# Altium PCB ACS712 Module PCB.PcbDoc
Units mm, origin at the board's own origin, x right, y up, seen from the top; angles counter-clockwise.
Board outline 26.8 x 11.3 mm, 2 copper layers (Top Layer, Bottom Layer); 9 components, 4 nets, 20 pads, 0 vias.
Unrouted connection lines stored in the file: 8.
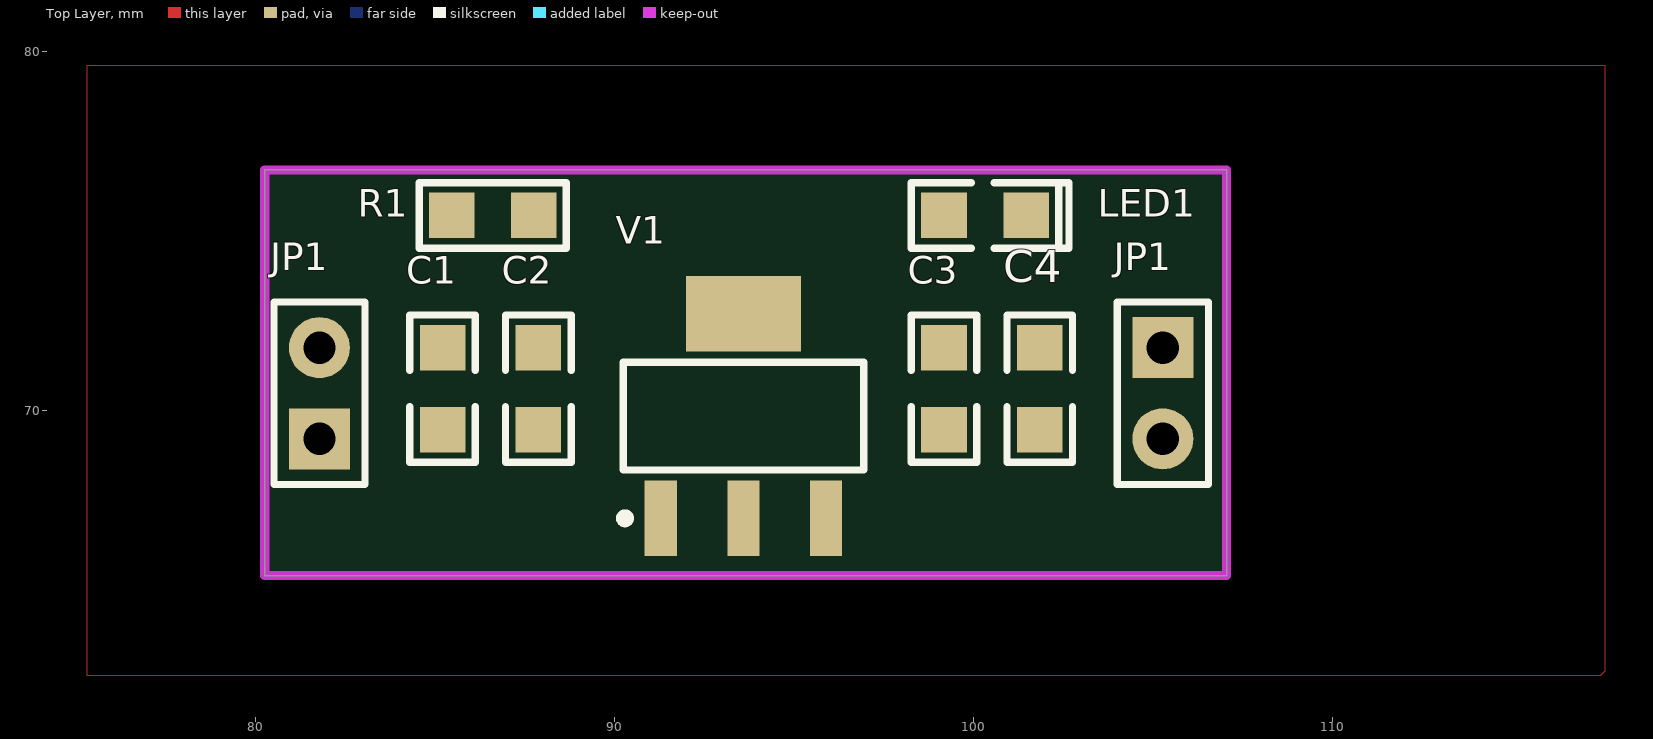
[diagram p0: Top Layer view]
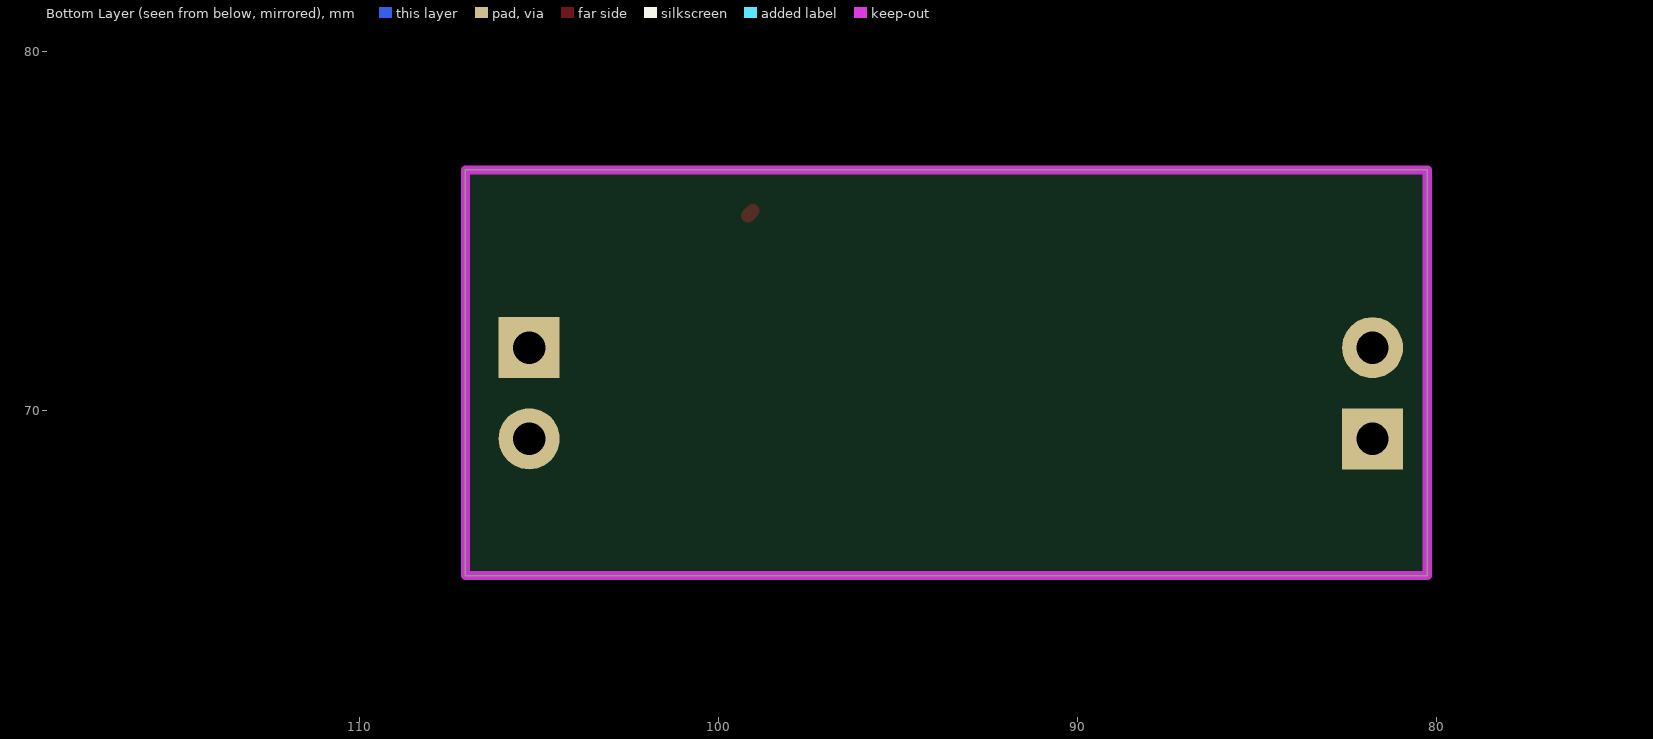
[diagram p1: Bottom Layer view, seen from below]

## Layer stack, top to bottom
Top Solder: solder mask 0.0102, Solder Resist, Dk 3.5
Top Layer: signal copper 0.0356
Dielectric 1: dielectric 0.32, FR-4, Dk 4.8
Bottom Layer: signal copper 0.0356
Bottom Solder: solder mask 0.0102, Solder Resist, Dk 3.5

## Board outline
80.264,65.405 80.264,76.708 107.061,76.708 107.061,65.405

## Design rules (kind name [scope] priority, off if disabled: settings)
Clearance [All] p1: gap=0.254 ignorepadtopadclearanceinfootprint=FALSE
PolygonConnect [All] p1: connectstyle=Relief reliefconductorwidth=0.254 reliefentries=4 polygonreliefangle="90 Angle" airgapwidth=0.254
RoutingVias [All] p1: holewidth=0.711 width=1.27 viastyle="Through Hole" minholewidth=0.711 minwidth=1.27 maxholewidth=0.711 maxwidth=1.27
SolderMaskExpansion [All] p1: expansion=0.102 istentingtop=FALSE
Width [All] p1: maxlimit=0.381 minlimit=0.127 preferedwidth=0.254
30 further rules are at their usual default settings.

## Classes and differential pairs
component class Sheet1: C1 C2 C3 C4 JP1 LED1 R1 V1

## Components (designator, comment, footprint, x,y, rotation, side; value= is the part's Value field where it differs from the comment)
C1 "100nF" "C 0805" 85.217,70.612 r90 top
C2 "10uF" "C 0805" 87.884,70.612 r90 top
C3 "=Value" "C 0805" 99.187,70.612 r90 top
C4 "=Value" "C 0805" 101.854,70.612 r90 top
JP1 "HDR-1X2" HDR-1X2 105.283,71.755 r270 top
JP1 "HDR-1X2" HDR-1X2 81.788,69.215 r90 top
LED1 "LED-SMD" "LED 0805R" 100.33,75.438 r0 top
R1 "1K" "R 0805" 86.614,75.438 r0 top
V1 "AMS1117-3V3" SOT223_L 93.599,69.85 r90 top

## Footprints (in the part's own frame and the unit in brackets; to place one, negate y for a bottom-side part, rotate by r counter-clockwise, add the part's x,y. Pads: shape width x height; smd on the part's side, far side on the other; paste and mask are expansions set on the pad)
"C 0805" [mil] "ï؟½ق¼ï؟½ï؟½ï؟½ï؟½ï؟½ئ¬ï؟½ï؟½ï؟½ï؟½"
  rect 50x50 smd: 1(-45,0) 2(45,0)
  silkscreen extent -81,-36 81,36, body extent -39,-24 39,24, height 20
HDR-1X2 [mm] "إإصë£¬2½إ"
  rect 1.7x1.7 hole 0.9: 1(0,0)
  round 1.7 hole 0.9: 2(2.54,0)
  silkscreen extent -1.27,-1.27 3.81,1.27, body extent -1.27,-1.27 3.81,1.27, height 8.5
"LED 0805R" [mil] "ï؟½ï؟½ة«0805LED"
  rect 50x50 smd: 1(-45,0) 2(45,0)
  silkscreen extent -81,-36 92,36, body extent -39,-25 39,25, height 32
"R 0805" [mm] "1/8Wï؟½ï؟½ئ¬ï؟½ï؟½ï؟½ï؟½"
  rect 1.27x1.27 smd: 1(-1.143,0) 2(1.143,0)
  silkscreen extent -2.05,-0.91 2.05,0.91, body extent -1,-0.62 1,0.63, height 0.5
SOT223_L [mm] "SOT223, 4-Leads, Body 6.5x3.5mm, Pitch 2.3mm, Lead Span 7mm, IPC High Density"
  rect 2.1x0.9 smd: 1(-2.85,2.3) 2(-2.85,0) 3(-2.85,-2.3)
  rect 2.1x3.2 smd: 4(2.85,0)
  silkscreen extent -2.97,-3.35 1.5,3.42, body extent -1.85,-3.35 1.85,3.35, height 1.7

## Part data
C1 C2 C3 C4: library part C, "Non-polar patch capacitor", BOM名称=无极性贴片电容, 学习资源=www.ooocke.com, 版权归属=源创客
JP1 JP1: library part "Header 2", "2P Connector", BOM名称=2P接插件, 学习资源=www.ooocke.com, 版权归属=源创客
LED1: "Patch LED", BOM名称=贴片LED, 学习资源=www.ooocke.com, 版权归属=源创客
R1: library part R, "Chip resistor", BOM名称="Chip resistor", 学习资源=www.ooocke.com, 版权归属=源创客
V1: library part AMS1117, "Three-terminal regulator chip", BOM名称=稳压芯片, 学习资源=www.ooocke.com, 版权归属=源创客

## Nets (pads, with @x,y where several pads share a name; then routed paths per layer and width w, separated by ;. In a path a pad name is that pad's centre, name@x,y a point inside that pad or via, vN(x,y) a via of type N, cw(c..) or ccw(c..) an arc to the next point about the centre after c; other vN are vias at no path point)
+3.3: C3.2 C4.2 JP1.1@105.283,71.755 R1.1 V1.2
+5: C1.2 C2.2 JP1.2@81.788,71.755 V1.3
GND: C1.1 C2.1 C3.1 C4.1 JP1.1@81.788,69.215 JP1.2@105.283,69.215 LED1.2 V1.1
NetLED1_1: LED1.1 R1.2 | length 0.2
  Top Layer w0.381: LED1.1@99.06,75.565 LED1.1
pads on no net: V1.4

## Polygon pours and split planes (outlines as drawn)
GND on Top Layer "NONET_L01_P000" (solid, shelved, pour order 0): 75.311,79.629 117.602,79.629 117.602,62.738 117.475,62.611 75.311,62.611

## Keep-outs
Keep-Out Layer:
  the board outline again, w0.254